# Altium PCB Integrator.PcbDoc
Units mm, origin at the board's own origin, x right, y up, seen from the top; angles counter-clockwise.
Board outline 12.75 x 17.02 mm, 2 copper layers (Top Layer, Bottom Layer); 6 components, 105 nets, 22 pads, 0 vias.
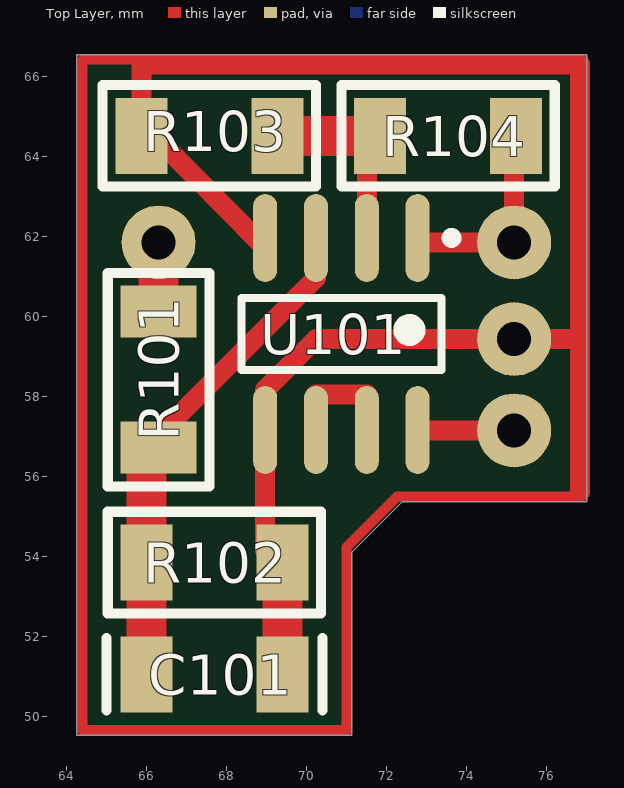
[diagram p0: Top Layer view]
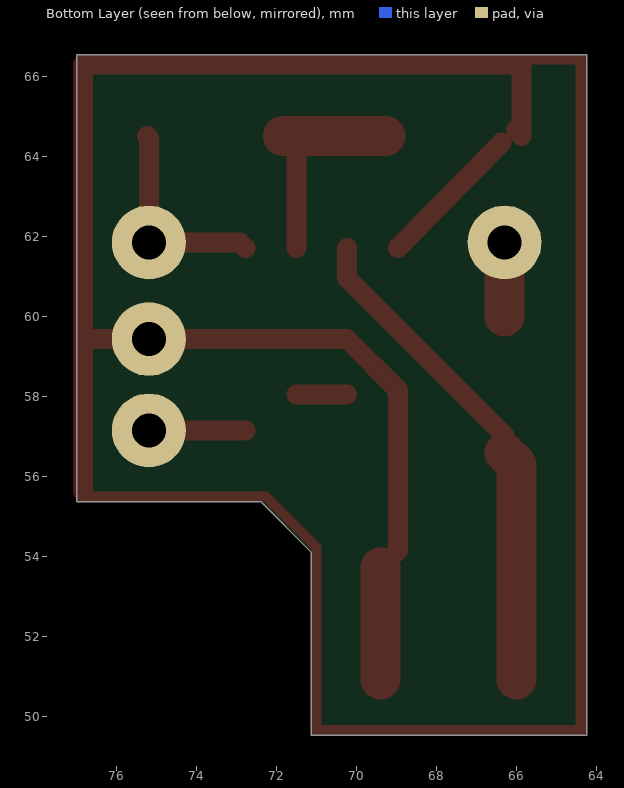
[diagram p1: Bottom Layer view, seen from below]

## Layer stack, top to bottom
Top Solder: solder mask 0.0102, Solder Resist, Dk 3.5
Top Layer: signal copper 0.0356
Dielectric 1: dielectric 0.32, FR-4, Dk 4.8
Bottom Layer: signal copper 0.0356
Bottom Solder: solder mask 0.0102, Solder Resist, Dk 3.5

## Board outline
64.244,49.53 64.244,66.548 76.994,66.548 76.994,55.372 72.39,55.372 71.12,54.102 71.12,49.53

## Design rules (kind name [scope] priority, off if disabled: settings)
Clearance [All] p1: gap=0.254
PolygonConnect [All] p1: connectstyle=Relief reliefconductorwidth=0.254 reliefentries=4 polygonreliefangle="90 Angle" airgapwidth=0.254
RoutingVias [All] p1: holewidth=0.711 width=1.27 viastyle="Through Hole" minholewidth=0.711 minwidth=1.27 maxholewidth=0.711 maxwidth=1.27
SolderMaskExpansion [All] p1: expansion=0.102
Width [All] p1: maxlimit=1 minlimit=0.254 preferedwidth=0.5
30 further rules are at their usual default settings.

## Components (designator, comment, footprint, x,y, rotation, side; value= is the part's Value field where it differs from the comment)
C101 "1uF" 1206_SMD_Capacitor 67.691,51.054 r180 top
R101 "10K" 1206_SMD_Resistor 66.294,58.42 r270 top
R102 "10K" 1206_SMD_Resistor 67.691,53.848 r180 top
R103 "10K" 1206_SMD_Resistor 67.564,64.516 r0 top
R104 "10K" 1206_SMD_Resistor 73.533,64.516 r0 top
U101 "MCP6022" SOIC-SN8_N 70.866,59.563 r270 top

## Footprints (in the part's own frame and the unit in brackets; to place one, negate y for a bottom-side part, rotate by r counter-clockwise, add the part's x,y. Pads: shape width x height; smd on the part's side, far side on the other; paste and mask are expansions set on the pad)
1206_SMD_Capacitor [mm]
  rect 1.3x1.9 smd: 1(-1.7,0) 2(1.7,0)
  silkscreen extent -2.7,-0.9 2.7,0.9
1206_SMD_Resistor [mm]
  rect 1.3x1.9 smd: 1(-1.7,0) 2(1.7,0)
  silkscreen extent -2.67,-1.27 2.67,1.27
SOIC-SN8_N [mm] "SOIC, 8-Leads, Body 4.9x3.8mm, Pitch 1.27mm, IPC Medium Density"
  oval 2.2x0.6 smd: 1(-2.4,1.905) 2(-2.4,0.635) 3(-2.4,-0.635) 4(-2.4,-1.905) 5(2.4,-1.905) 6(2.4,-0.635) 7(2.4,0.635) 8(2.4,1.905)
  silkscreen extent -2.52,-2.5 0.9,2.88, body extent -2,-2.5 2,2.5, height 1.75

## Part data
C101: library part "Capacitor SMD", "Capacitor"
R101 R102 R103 R104: library part Resistor, "Resistor"
U101: library part MCP6022-I/SN, "Rail-to-Rail Input/Output, 10 MHz Operational Amplifier, 8-Pin SOIC, Industrial Temperature"

## Free pads (board coordinates)
  round 1.85 hole 0.85: 81(66.294,61.849) 82(75.184,59.436) 83(75.184,57.15) 84(75.184,61.849)

## Nets (pads, with @x,y where several pads share a name; then routed paths per layer and width w, separated by ;. In a path a pad name is that pad's centre, name@x,y a point inside that pad or via, vN(x,y) a via of type N, cw(c..) or ccw(c..) an arc to the next point about the centre after c; other vN are vias at no path point)
+5V: 
+BATT: 
+UP: pad.83 U101.8 | length 2.4
  Top Layer w0.5: U101.8@72.771,57.15 pad.83
-BATT: 
BTN0: 
BTN1: 
BTN2: 
BTN3: 
BTN4: 
BTN5: 
GND: C101.1 pad.82 R102.1 R103.1 U101.4 U101.5 | length 79.2
  Top Layer w0.254: 66.167,66.421 64.389,66.421 64.389,49.657 70.993,49.657 70.993,54.229 72.263,55.499 76.708,55.499 76.835,55.626
  Top Layer w0.5: R103.1@66.009,64.661 R103.1 65.864,66.294 76.835,66.294 76.835,55.626 ; R103.1@66.365,64.35 68.834,61.838 U101.4@68.961,61.709 ; R102.1@69.391,53.721 68.961,54.151 68.961,58.166 70.231,59.436 pad.82 76.708,59.436
  Top Layer w1: C101.1@69.391,50.927 R102.1@69.391,53.721
GND_5V: 
GND_VDD: 
GND_VDDA: 
I_TX: 
NetBF1_1: 
NetBF1_2: 
NetBQ1_1: 
NetBQ1_2: 
NetBQ2_1: 
NetBQ2_2: 
NetC1_1: 
NetC1_2: 
NetC2_2: 
NetC5_1: 
NetC7_1: 
NetC7_2: 
NetC12_2: 
NetC16_2: 
NetC19_2: 
NetC24_1: 
NetC28_2: 
NetC29_2: 
NetC30_2: 
NetC31_1: 
NetC31_2: 
NetC32_1: 
NetC32_2: 
NetC35*_1: 
NetC35*_2: 
NetC35_1: 
NetC40_2: 
NetC43_1: 
NetC43_2: 
NetC44_1: 
NetC101_2: C101.2 R101.2 R102.2 U101.3 | length 12.5
  Top Layer w0.5: R101.2@66.294,56.593 66.294,57.023 70.231,60.96 U101.3@70.231,61.709
  Top Layer w1: C101.2@65.991,50.927 65.991,53.721 65.991,56.29 R101.2@66.294,56.593
NetE1_1: 
NetJ3_1: 
NetLCD1_3: 
NetLCD1_4: 
NetLCD1_6: 
NetLCD1_11: 
NetLCD1_12: 
NetLCD1_13: 
NetLCD1_14: 
NetLCD1_15: 
NetLCD1_16: 
NetQ1_1: 
NetQ1_2: 
NetQ1_4: 
NetQ1_5: 
NetQ2_1: 
NetQ2_2: 
NetQ3_1: 
NetQ4_1: 
NetQ6_1: 
NetQ7_1: 
NetQ8_1: 
NetQ8_3: 
NetR2_1: 
NetR3_1: 
NetR15_2: 
NetR16_1: 
NetR22_2: 
NetR23_1: 
NetR24_2: 
NetR25_1: 
NetR25_2: 
NetR26_2: 
NetR28_2: 
NetR30_1: 
NetR33_1: 
NetR33_2: 
NetR34_1: 
NetR34_2: 
NetR35_1: 
NetR36_1: 
NetR36_2: 
NetR37_1: 
NetR37_2: 
NetR38_2: 
NetR39_1: 
NetR47_1: pad.81 R101.1 | length 1.9
  Top Layer w1: R101.1@66.294,59.993 pad.81
NetR103_2: R103.2 R104.1 U101.2 | length 5.5
  Top Layer w0.5: U101.2@71.501,61.709 71.501,64.184 R104.1
  Top Layer w1: R103.2 R104.1
NetR104_2: pad.84 R104.2 U101.1 | length 5.2
  Top Layer w0.5: U101.1@72.771,61.709 72.911,61.849 pad.84 75.184,64.467 R104.2
NetU2_4: 
NetU8_9: 
NetU101_6: U101.6 U101.7 | length 1.3
  Top Layer w0.5: U101.6@70.231,58.052 U101.7@71.501,58.052
SIN_C: 
TX: 
U_RX: 
VDD: 
VDDA: 
VLCD: 
ZERO: 

## Silkscreen, mask and mechanical layers (free items; w line width, h text height)
Mechanical 1:
  the board outline again, w0.254